# Altium PCB PCB1.PcbDoc
Units mm, origin at the board's own origin, x right, y up, seen from the top; angles counter-clockwise.
Board outline 81.03 x 50.55 mm, 2 copper layers (Top Layer, Bottom Layer); 11 components, 7 nets, 23 pads, 0 vias.
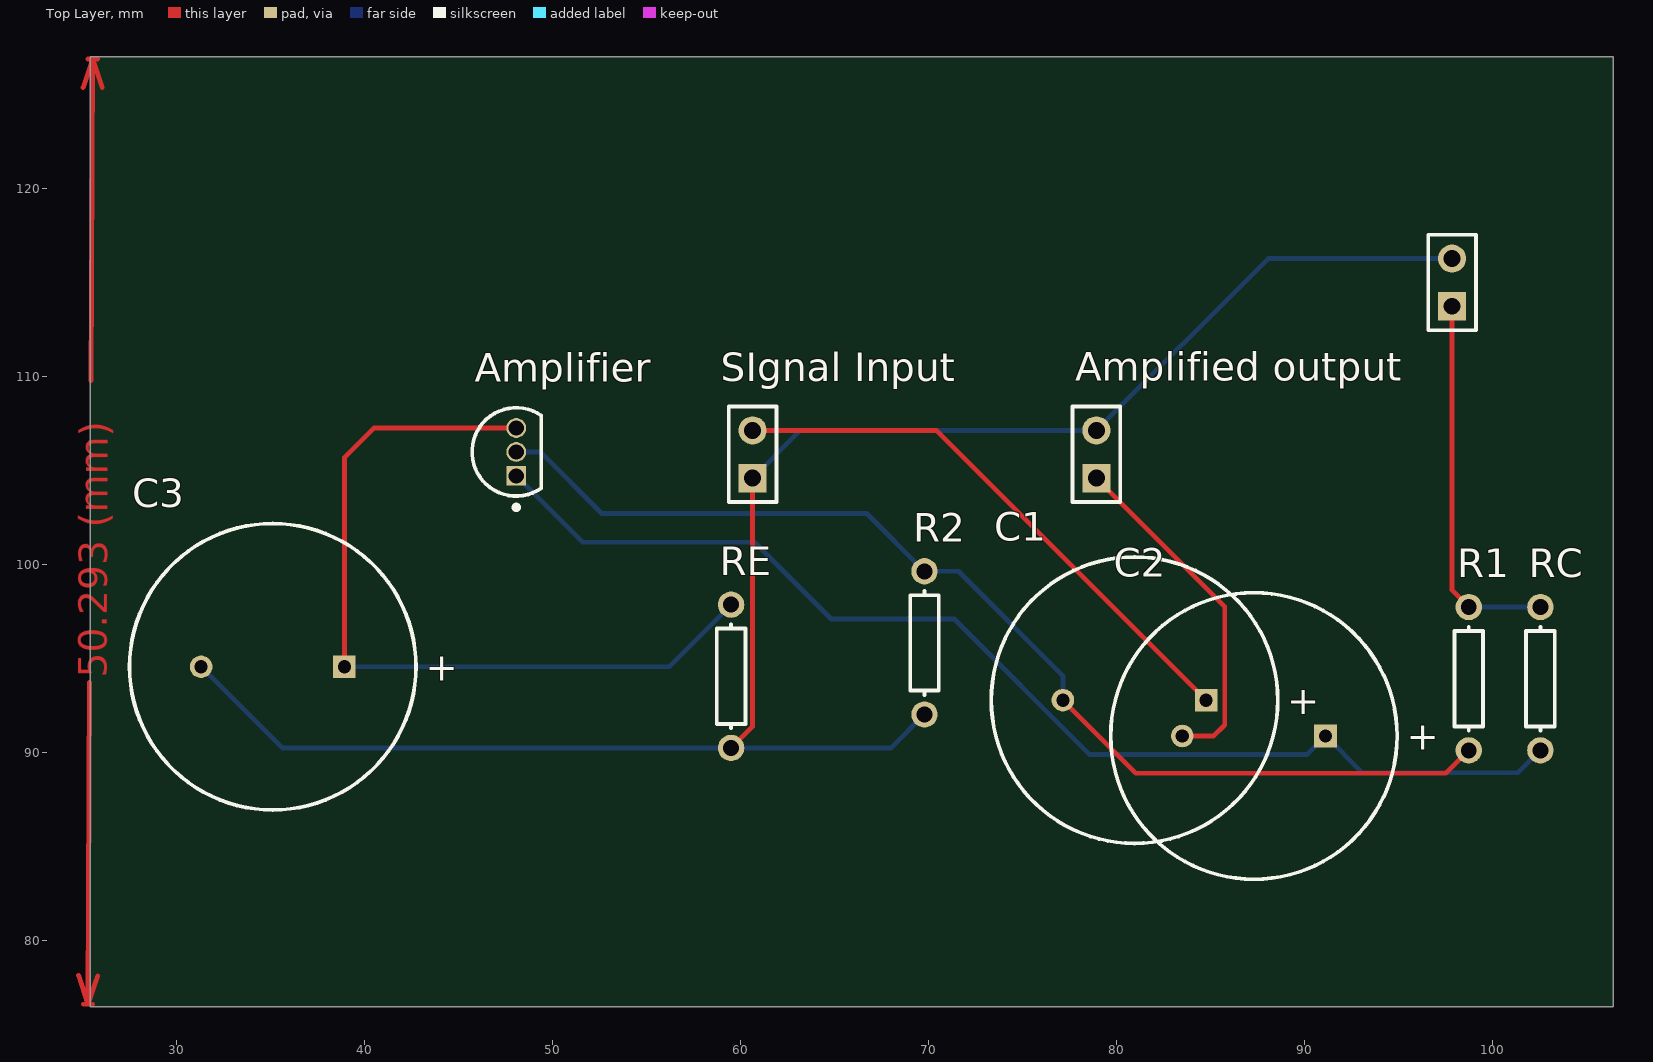
[diagram p0: Top Layer view]
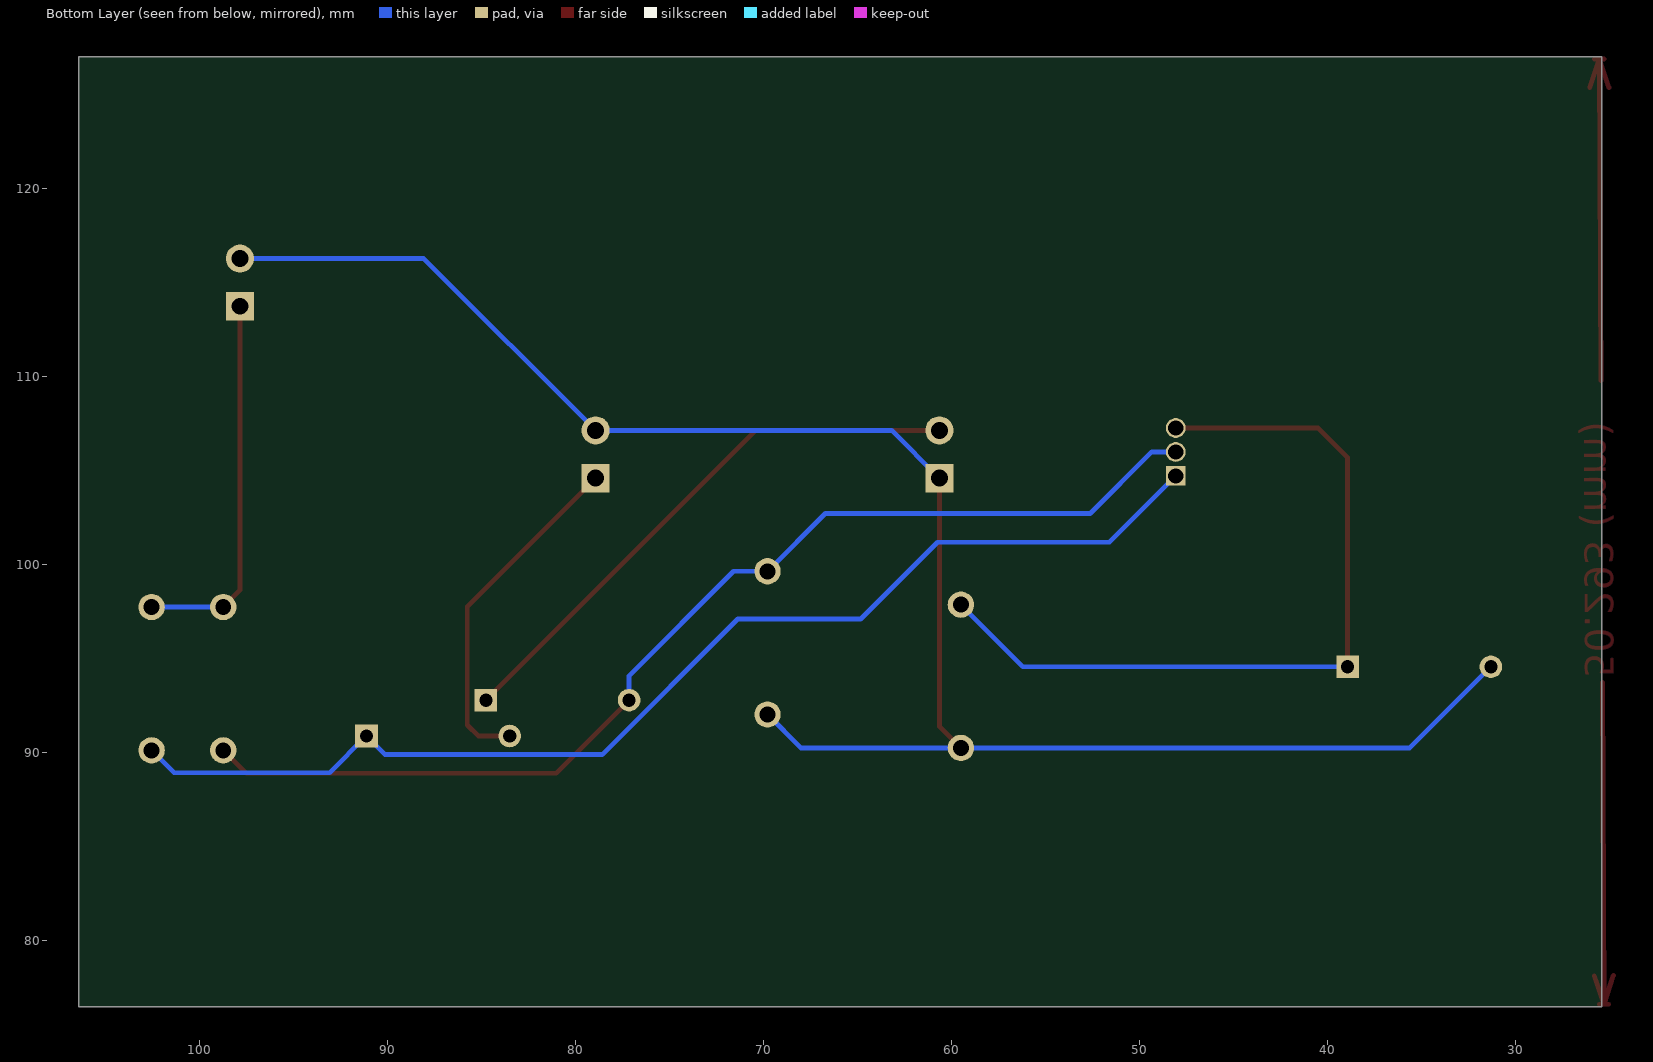
[diagram p1: Bottom Layer view, seen from below]

## Layer stack, top to bottom
Top Solder: solder mask 0.0102, Solder Resist, Dk 3.5
Top Layer: signal copper 0.0356
Dielectric 1: dielectric 0.32, FR-4, Dk 4.8
Bottom Layer: signal copper 0.0356
Bottom Solder: solder mask 0.0102, Solder Resist, Dk 3.5

## Board outline
25.4,76.454 106.426,76.454 106.426,127 25.4,127

## Design rules (kind name [scope] priority, off if disabled: settings)
Clearance [All] p1: gap=0.7 ignorepadtopadclearanceinfootprint=FALSE
PolygonConnect [All] p1: connectstyle=Direct reliefconductorwidth=0.254 reliefentries=4 polygonreliefangle="90 Angle" airgapwidth=0.254
RoomDefinition Sheet1 [InComponentClass('Sheet1')] p1: confinementstyle=ConfineIn formatcopy=TRUE lockcomponents=FALSE outline 25.197,75.489 106.172,75.489 106.172,127.559 25.197,127.559
RoutingLayers [All] p1: top layer_v5=FALSE bottom layer_v5=TRUE
RoutingVias [All] p1: holewidth=0.711 width=1.27 viastyle="Through Hole" minholewidth=0.711 minwidth=1.27 maxholewidth=0.711 maxwidth=1.27
SolderMaskExpansion [All] p1: expansion=0.102 istentingtop=FALSE
Width [All] p1: maxlimit=0.254 minlimit=0.254 preferedwidth=0.254
29 further rules are at their usual default settings.

## Classes and differential pairs
component class Sheet1: "Amplified output" Amplifier C1 C2 C3 R1 R2 RC RE "SIgnal Input"

## Components (designator, comment, footprint, x,y, rotation, side; value= is the part's Value field where it differs from the comment)
"Amplified output" "Header 2" HDR1X2 78.918,104.572 r90 top
Amplifier "BC547B" ONSC-TO-92-3-29-11 48.057,105.969 r90 top
C1 "Cap Pol1" RB7.6-15 80.95,92.761 r0 top value=10mu
C2 "Cap Pol1" RB7.6-15 87.3,90.856 r0 top value=10mu
C3 "Cap Pol1" RB7.6-15 35.103,94.539 r0 top value=100mu
R1 "" AXIAL-0.3 98.73,93.904 r90 top value=10K
R2 "" AXIAL-0.3 69.774,95.809 r90 top value=2.2K
RC "" AXIAL-0.3 102.54,93.904 r90 top value=4.7K
RE "" AXIAL-0.3 59.487,94.031 r90 top value=1K
"SIgnal Input" "Header 2" HDR1X2 60.63,104.572 r90 top
? "Header 2" HDR1X2 97.841,113.716 r90 top

## Footprints (in the part's own frame and the unit in brackets; to place one, negate y for a bottom-side part, rotate by r counter-clockwise, add the part's x,y. Pads: shape width x height; smd on the part's side, far side on the other; paste and mask are expansions set on the pad)
AXIAL-0.3 [mm] "Axial Device, Thru-Hole; 2 Leads; 0.3 in Pin Spacing"
  round 1.4 hole 0.85: 1(-3.81,0) 2(3.81,0)
  silkscreen extent -2.77,-0.76 2.77,0.76
HDR1X2 [mm] "Connector; Header; 2 Position"
  rect 1.5x1.5 hole 0.9: 1(0,0)
  round 1.5 hole 0.9: 2(2.54,0)
  silkscreen extent -1.27,-1.27 3.81,1.27
ONSC-TO-92-3-29-11 [mm] "TO, 3-Leads, Body Dia 4.7mm, Pitch 1.27mm"
  rect 1.05x1.05 hole 0.8: 1(-1.27,0)
  round 1.05 hole 0.8: 2(0,0) 3(1.27,0)
  silkscreen extent -3.07,-1.34 2.35,2.35, body extent -2.35,-1.33 2.36,2.36, height 7.87
RB7.6-15 [mm] "Polarized Capacitor (Radial); 2 Leads"
  rect 1.2x1.2 hole 0.7: 1(3.81,0)
  round 1.2 hole 0.7: 2(-3.81,0)
  silkscreen extent -7.62,-7.62 7.62,7.62

## Part data
"Amplified output" "SIgnal Input" ?: "Header, 2-Pin", LatestRevisionDate=17-Jul-2002, LatestRevisionNote="Re-released for DXP Platform.", Publisher="Altium Limited"
Amplifier: library part CMP-1048-01467-1, "Amplifier Transistor, NPN Silicon, 3-Pin TO-92, Bulk Box", Manufacturer="On Semiconductor", ComponentLink1Description="Manufacturer URL", ComponentLink1URL=http://www.onsemi.com/, ComponentLink2Description=Datasheet, ComponentLink2URL=http://www.onsemi.com/pub_link/Collateral/BC546-D.PDF, ComponentLink3Description="Package Specification", ComponentLink3URL=http://www.onsemi.cn/pub_link/Collateral/2N6426-D.PDF, DatasheetVersion="Rev. 7", fT Min (MHz)=150, IC Continuous (A)=0.1, Mounting Technology="Through Hole", PackageDescription="3-Pin Transistor Outline, Body 4.825 x 3.685 mm, Pitch 1.27 mm", PackageReference=TO-92-3-29-11_AM_SL, PackageVersion="Rev. AM", Packing="Bulk Box", PartNumber=BC547B, Polarity=NPN, RoHS=FALSE
C1 C2 C3: "Polarized Capacitor (Radial)", LatestRevisionDate=17-Jul-2002, LatestRevisionNote="Re-released for DXP Platform.", PackageDescription="Polarized Capacitor (Radial); 2 Leads", PackageReference=RB7.6-15, Published=8-Jun-2000, Publisher="Altium Limited"
R1 R2 RC RE: library part Res1, "Resistor", LatestRevisionDate=17-Jul-2002, LatestRevisionNote="Re-released for DXP Platform.", PackageDescription="Axial Device, Thru-Hole; 2 Leads; 0.3 in Pin Spacing", PackageReference=AXIAL-0.3, Published=8-Jun-2000, Publisher="Altium Limited"

## Nets (pads, with @x,y where several pads share a name; then routed paths per layer and width w, separated by ;. In a path a pad name is that pad's centre, name@x,y a point inside that pad or via, vN(x,y) a via of type N, cw(c..) or ccw(c..) an arc to the next point about the centre after c; other vN are vias at no path point)
GND: "Amplified output.2" "SIgnal Input.1" ?.2 C3.2 R2.1 RE.1 | length 97.9
  Top Layer w0.254: RE.1 60.63,91.364 60.63,104.572
  Bottom Layer w0.254: C3.2 35.611,90.221 RE.1 67.996,90.221 R2.1 ; 60.63,104.572 63.17,107.112 78.918,107.112 88.062,116.256 ?.2
"NetAmplified output_1": "Amplified output.1" C2.2 | length 18.5
  Top Layer w0.254: 78.918,104.572 85.75,97.739 85.75,91.44 85.166,90.856 C2.2
NetAmplifier_1: Amplifier.1 C2.1 RC.1 | length 62.3
  Bottom Layer w0.254: Amplifier.1 51.587,101.168 60.731,101.168 64.821,97.079 71.349,97.079 78.562,89.865 90.119,89.865 C2.1 93.066,88.9 101.346,88.9 RC.1
NetAmplifier_2: Amplifier.2 C1.2 R1.1 R2.2 | length 59
  Top Layer w0.254: C1.2 81.026,88.875 97.511,88.875 R1.1
  Bottom Layer w0.254: Amplifier.2 49.327,105.969 52.603,102.692 66.7,102.692 R2.2 71.584,99.619 77.14,94.063 C1.2
NetAmplifier_3: Amplifier.3 C3.1 RE.2 | length 42.9
  Top Layer w0.254: C3.1 38.913,105.664 40.488,107.239 Amplifier.3
  Bottom Layer w0.254: C3.1 56.185,94.539 RE.2
NetC1_1: "SIgnal Input.2" C1.1 | length 30.1
  Top Layer w0.254: 60.63,107.112 70.409,107.112 C1.1
VCC: ?.1 R1.2 RC.2 | length 20.2
  Top Layer w0.254: ?.1 97.841,98.603 R1.2
  Bottom Layer w0.254: R1.2 RC.2
copper on no net: | length 41.7
  Top Layer w0.254: 24.773,78.108 25.273,76.581 ; 25.011,125.352 25.527,126.873 ; 25.019,76.582 25.527,76.58 ; 25.273,126.874 25.781,126.872 ; 25.359,93.703 25.273,76.581 ; 25.441,109.751 25.527,126.873 ; 25.789,78.102 25.273,76.581 ; 26.027,125.346 25.527,126.873

## Other copper
Top Layer:
  text "50.293 (mm)" at 26.275,93.953 h1.52 r89.71

## Dimensions
25.654,127.508 to 105.537,137.414 on Bottom Layer

## Text inside footprints (layer, text, board x,y; h text height)
C1: Top Overlay "+" at 89.082,92.024 h1.5
C2: Top Overlay "+" at 95.432,90.119 h1.5
C3: Top Overlay "+" at 43.235,93.802 h1.5